# Altium PCB Microwave.PcbDoc
Units mm, origin at the board's own origin, x right, y up, seen from the top; angles counter-clockwise.
Board outline 71.12 x 41.91 mm, 2 copper layers (Top Layer, Bottom Layer); 51 components, 34 nets, 173 pads, 70 vias.
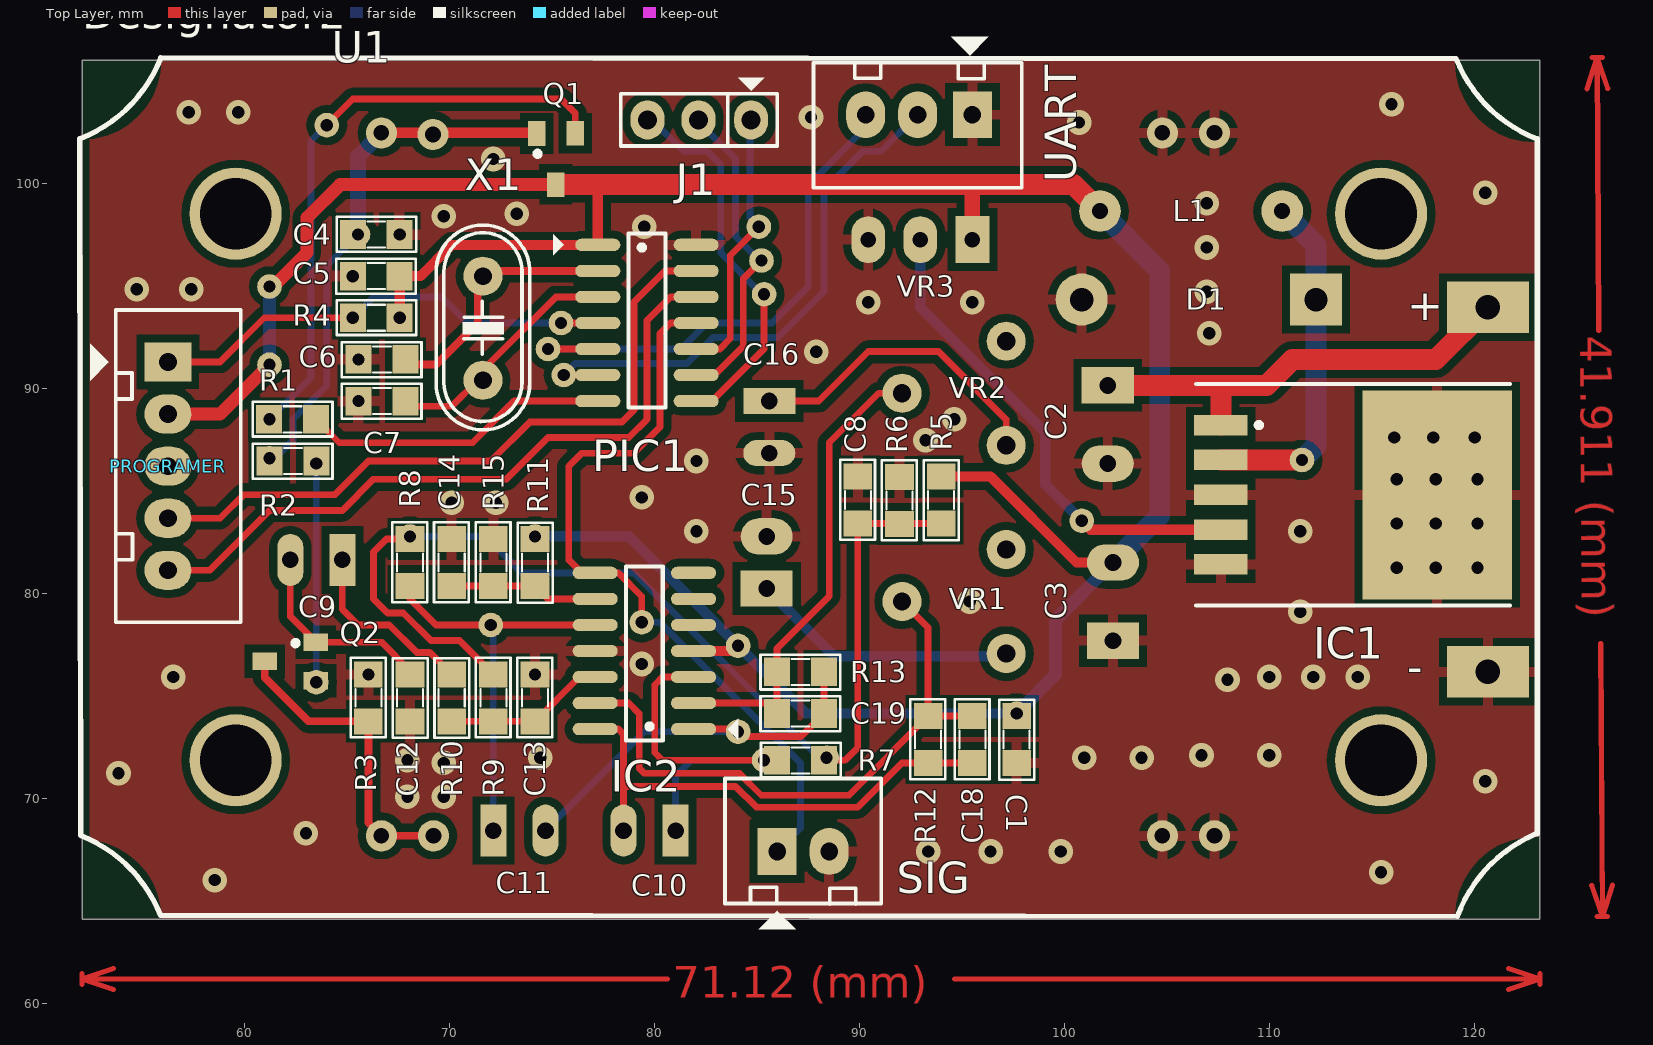
[diagram p0: Top Layer view]
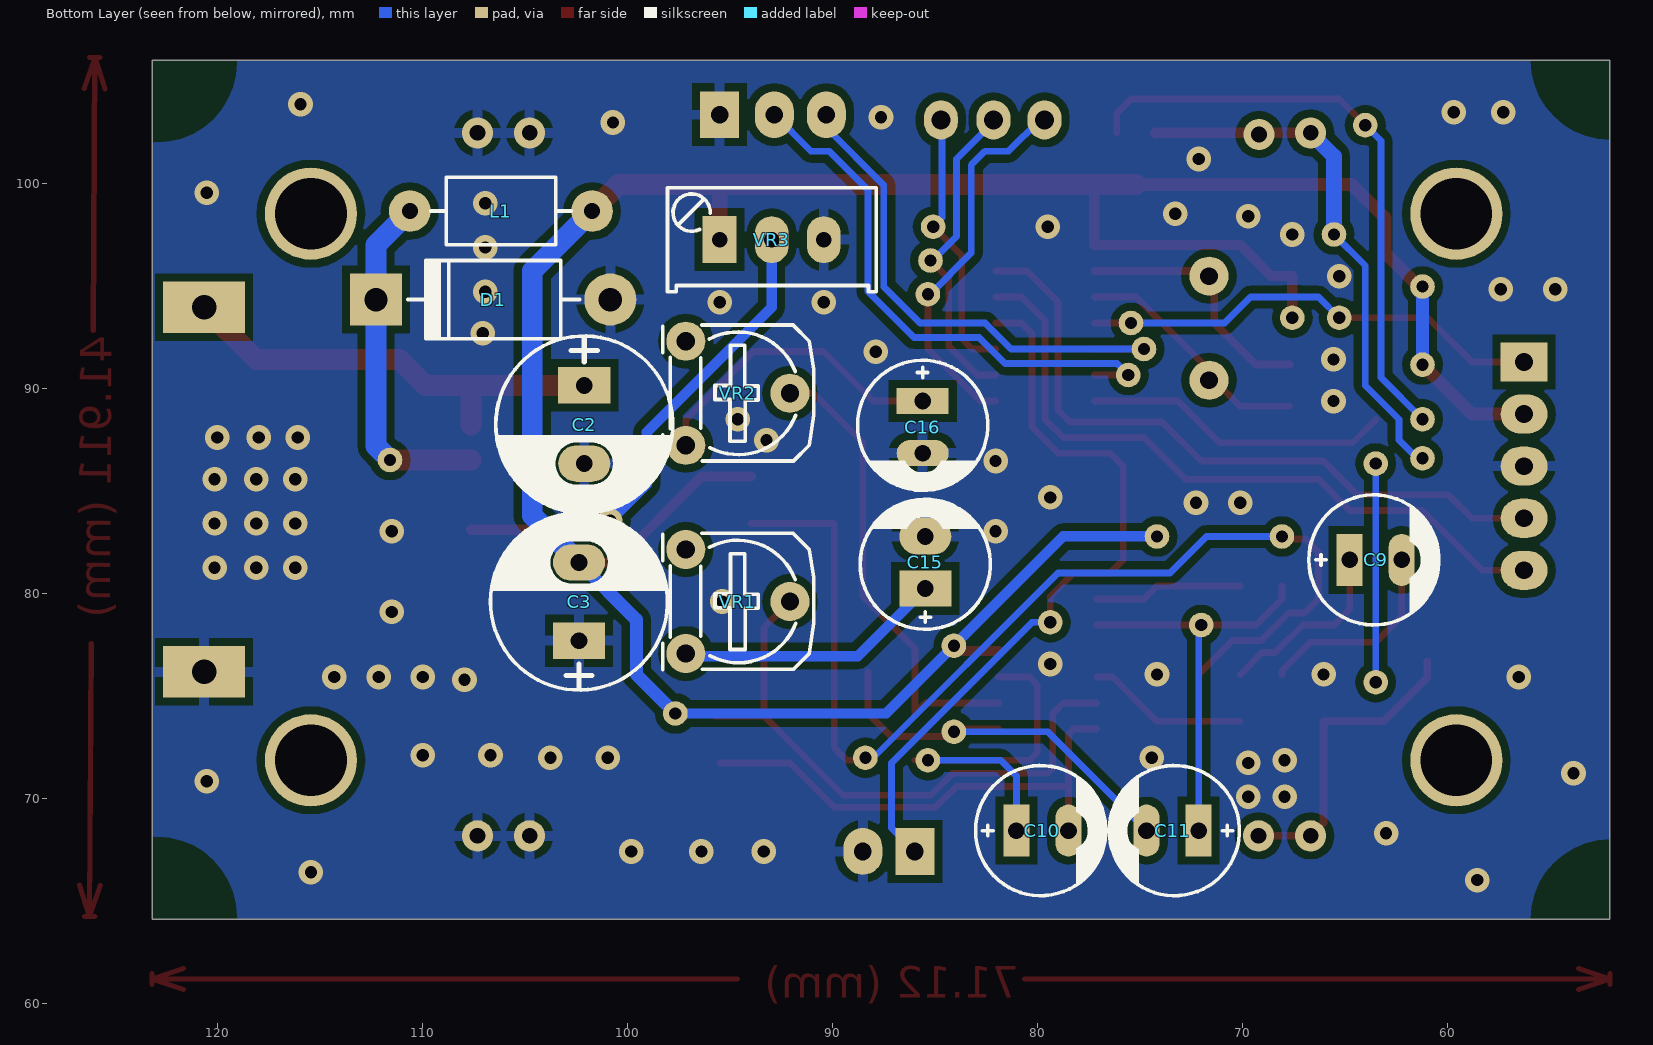
[diagram p1: Bottom Layer view, seen from below]
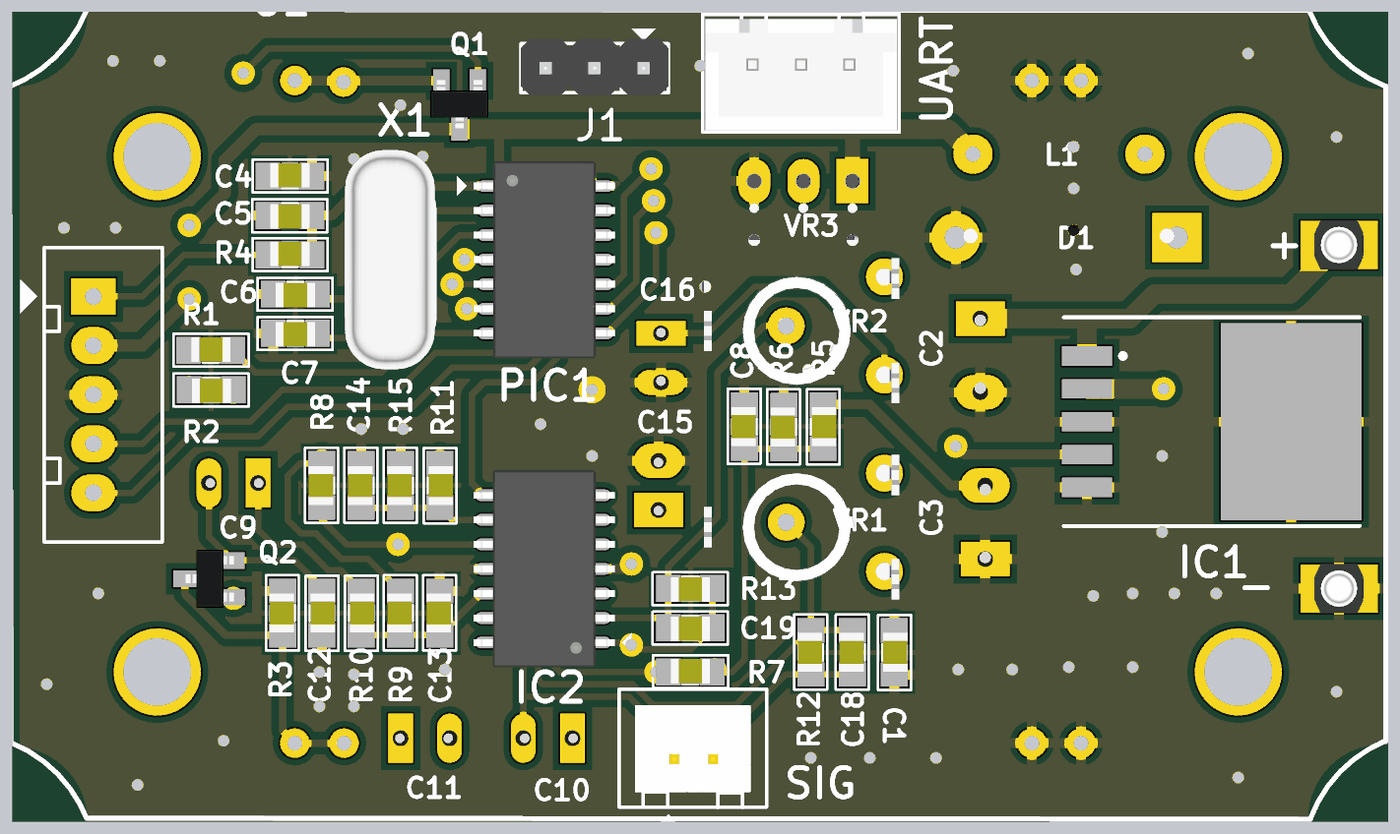
[diagram p2: 3D render of the assembled board from above, using the file's embedded part models]
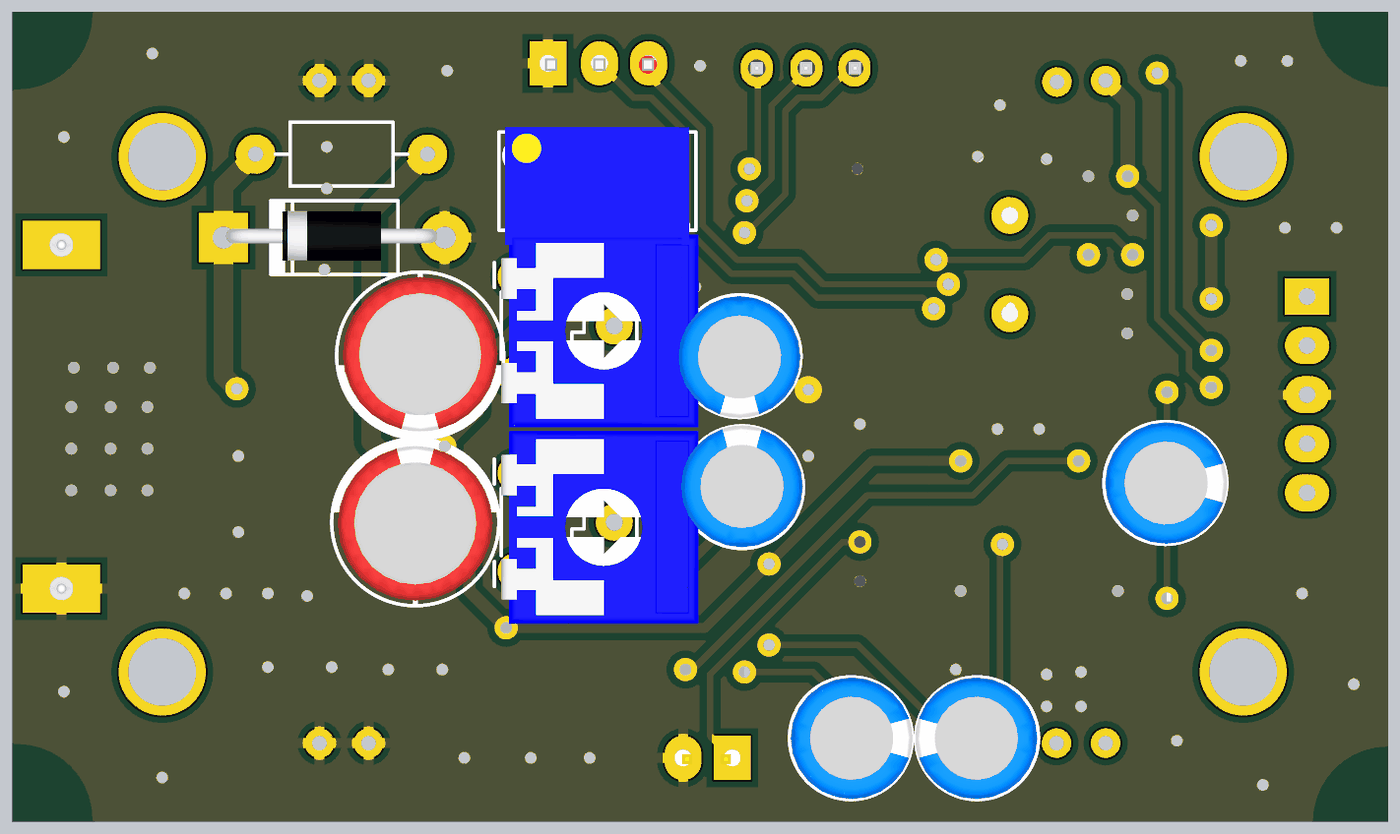
[diagram p3: 3D render of the assembled board from below, using the file's embedded part models]

## Layer stack, top to bottom
Top Layer: signal copper 0.0356
Dielectric: dielectric 0.32, FR-4, Dk 4.8
Bottom Layer: signal copper 0.0356

## Board outline
52.07,106.045 123.19,106.045 123.19,64.135 52.07,64.135

## Design rules (kind name [scope] priority, off if disabled: settings)
Clearance [All] p1: gap=0.381
PlaneConnect [All] p1: planeconnectstyle=Relief reliefexpansion=0.508 reliefentries=4 reliefconductorwidth=0.508 reliefairgap=0.254
PolygonConnect [All] p1: connectstyle=Relief reliefconductorwidth=0.508 reliefentries=4 polygonreliefangle="90 Angle"
RoomDefinition Microwave [InComponentClass('Microwave')] p1: confinementstyle=ConfineIn formatcopy=TRUE lockcomponents=FALSE outline 0,0 50.8,0 50.8,25.4 0,25.4
RoutingVias [All] p1: holewidth=0.711 width=1.27 viastyle="Through Hole" minholewidth=0.711 minwidth=1.27 maxholewidth=0.711 maxwidth=1.27
SilkscreenOverComponentPads [All] p1: minsilkscreentomaskgap=0.254
SolderMaskExpansion [All] p1: expansion=0.102
Width [All] p1: maxlimit=1.27 minlimit=0.254 preferedwidth=0.33
26 further rules are at their usual default settings.

## Components (designator, comment, footprint, x,y, rotation, side; value= is the part's Value field where it differs from the comment)
+ "1" TP 120.65,93.98 r0 top
- "1" TP 120.65,76.2 r0 top
C1 "104" SM-0805 97.663,72.898 r90 top
C2 "100uF/35V" CP1.5/3.4 102.108,90.17 r270 bottom
C3 "1000uF/16V" CP1.5/3.4 102.362,77.724 r90 bottom
C4 "104" SM-0805 66.421,97.536 r180 top
C5 "104" SM-0805 66.421,95.504 r0 top
C6 "22p" SM-0805 66.7,91.44 r0 top
C7 "22p" SM-0805 66.7,89.408 r0 top
C8 "104" SM-0805 89.916,84.582 r270 top
C9 "4.7uF" CP1/2.5#1 64.77,81.661 r180 bottom
C10 "10uF" CP1/2.5#1 81.026,68.453 r180 bottom
C11 "10uF" CP1/2.5#1 72.136,68.453 r0 bottom
C12 "104" SM-0805 68.072,74.93 r90 top
C13 "104" SM-0805 74.168,74.93 r270 top
C14 "104" SM-0805 70.104,81.534 r270 top
C15 "10uF" CP1/2.5#2 85.471,80.264 r90 bottom
C16 "10uF" CP1/2.5#1 85.598,89.408 r270 bottom
C18 "222" SM-0805 95.504,72.898 r270 top
C19 "222" SM-0805 87.122,74.168 r0 top
D1 "1N4007" D2A 112.268,94.361 r180 bottom
Designator2 "Comment" FT-131-BOX 87.884,84.709 r0 top locked
IC1 "LM2576" 936A-02 112.903,84.836 r270 top
IC2 "LM324" SO-14 79.502,77.851 r180 top
J1 "Jumper 3" JP3 82.169,103.124 r180 top
L1 "150mH" L/0.4 110.617,98.679 r180 bottom
PIC1 "PIC16F688" SO-14 79.629,92.583 r0 top
PROGRAMER "JP5" CON5 56.261,91.313 r270 top
Q1 "C1815" SOT23B 75.184,101.219 r180 top
Q2 "C1815" SOT23B 62.23,76.708 r90 top
R1 "5K1" SM-0805 62.332,88.519 r180 top
R2 "5K1" SM-0805 62.357,86.487 r0 top
R3 "12k" SM-0805 66.04,74.93 r270 top
R4 "47K" SM-0805 66.421,93.472 r180 top
R5 "100k" SM-0805 93.98,84.582 r90 top
R6 "100k" SM-0805 91.948,84.557 r270 top
R7 "330k" SM-0805 87.122,71.882 r180 top
R8 "330k" SM-0805 68.072,81.534 r270 top
R9 "330k" SM-0805 72.136,74.93 r270 top
R10 "12k" SM-0805 70.104,74.93 r90 top
R11 "100K" SM-0805 74.168,81.534 r90 top
R12 "1M" SM-0805 93.345,72.898 r270 top
R13 "1M" SM-0805 87.122,76.2 r0 top
R15 "100K" SM-0805 72.136,81.534 r270 top
SIG "JP2" CON2 85.979,67.437 r0 top
U1 "HB100" HB100_SENSOR 86.995,85.979 r0 top locked
UART "JP3" CON3 95.377,103.378 r180 top
VR1 "10K" VR 97.155,82.169 r270 bottom
VR2 "10K" VR 97.155,92.329 r270 bottom
VR3 "10K" VR1 95.504,97.282 r180 bottom
X1 "4Mhz" XT2 71.628,92.964 r270 top

## Footprints (in the part's own frame and the unit in brackets; to place one, negate y for a bottom-side part, rotate by r counter-clockwise, add the part's x,y. Pads: shape width x height; smd on the part's side, far side on the other; paste and mask are expansions set on the pad)
936A-02 [mm] "D2-PAK; 5 Leads; Body 14.7 (inc. leads) x 10.2 mm (LxW max)"
  rect 1x2.6 smd: 1(-3.4,-5.275) 2(-1.7,-5.275) 3(0,-5.275) 4(1.7,-5.275) 5(3.4,-5.275)
  rect 10.2x7.3 smd: 6(0,5.275)
  silkscreen extent -5.4,-6.48 5.4,8.82
CON2 [mil] "CON2"
  rect 75x90 hole 34: 1(0,0)
  oval 75x90 hole 34: 2(100,0)
  silkscreen extent -100,-150 200,140, body extent -68,-70 168,107, height 236
CON3 [mil] "CON 3"
  rect 75x90 hole 34: 1(-5,0)
  oval 75x90 hole 34: 2(100,0) 3(200,0)
  silkscreen extent -100,-150 300,140, body extent -95,-90 295,136, height 276
CON5 [mil] "CON5"
  rect 75x90 hole 34: 1(0,0)
  oval 75x90 hole 34: 2(100,0) 3(200,0) 4(300,0) 5(400,0)
  silkscreen extent -100,-150 500,140
CP1.5/3.4 [mil] "Tu hoa 220->470uF,16V, 470uF/16V,25V"
  rect 70x100 hole 32: 1(0,0)
  oval 70x100 hole 32: 2(150,0)
  silkscreen extent -95,-170 245,170, body extent -85,-157 230,157, height 446
CP1/2.5#1 [mil] "Tu hoa 33 >100 uF,50V, 220uF/16V,25V"
  rect 50x100 hole 32: 1(0,0)
  oval 50x100 hole 32: 2(100,0)
  silkscreen extent -78,-125 172,125, body extent -76,-124 172,124, height 422
CP1/2.5#2 [mil] "Tu hoa 33 >100 uF,50V, 220uF/16V,25V"
  rect 70x100 hole 32: 1(0,0)
  oval 70x100 hole 32: 2(100,0)
  silkscreen extent -78,-125 172,125, body extent -76,-124 172,124, height 422
D2A [mil] "Diode 2A, W 150mil, L 450mil"
  round 100 hole 45: 1(450,0)
  rect 100x100 hole 45: 2(0,0)
  silkscreen extent 61,-75 391,75, body extent 5,-47 435,54, height 100
FT-131-BOX [mm]
  round 4.5 hole 3.5: 0(-28.321,-12.827) 0(-28.321,13.843) 0(27.559,-12.827) 0(27.559,13.843)
  silkscreen extent -35.94,-20.45 35.18,21.46
HB100_SENSOR [mil] "HB100_SENSOR"
  round 60 hole 30: 1(-800,650) 2(-701,647) 3(700,650) 4(800,650) 5(700,-700) 6(800,-700) 7(-800,-700) 8(-700,-700)
JP3 [mil] "Jumper 3"
  oval 65x75 hole 36: 1(-100,0) 2(1,0) 3(99,0)
  silkscreen extent -150,-81 150,50, body extent -150,-60 150,55, height 355
L/0.4 [mil] "Inductor , 2 Pin, L 350mil, W 150 mil"
  round 80 hole 31: 1(0,0) 2(350,0)
  silkscreen extent 40,-65 310,65
SM-0805 [mil] "Compoment SMD 80x50mil"
  rect 50x55 smd: 1(-45,0) 2(45,0)
  silkscreen extent -77,-34 76,33, body extent -40,-27 40,23, height 24
SO-14 [mm] "SOIC, 14-Leads, Body 9.9x3.9mm, Pitch 1.27mm, IPC Medium Density"
  oval 2.2x0.6 smd: 1(-2.4,4.445) 2(-2.4,3.175) 3(-2.4,1.905) 4(-2.4,0.635) 5(-2.4,-0.635) 6(-2.4,-1.905) 7(-2.4,-3.175) 8(2.4,-3.175) 9(2.4,-1.905) 10(2.4,-0.635) 11(2.4,0.635) 12(2.4,1.905) 13(2.4,3.175) 14(2.4,4.445)
  silkscreen extent -4.57,-3.48 0.9,5, body extent -3.71,-4.47 3.59,5.73, height 1.1
SOT23B [mm] "SOT 23B"
  rect 0.85x1.2 smd: 1(0.94,-1.245) 2(0,1.25) 3(-0.95,-1.25)
  silkscreen extent 0.77,-0.38 1.02,-0.13, body extent -1.5,-1.3 1.5,1.2, height 1.06
TP [mm] "Connect 1"
  rect 4x2.5 hole 1.2: TP1(0,0)
  body extent -1.27,-1.27 1.27,1.27, height 4.53
VR [mil] "Resistor Variable"
  round 75 hole 35: 1(0,0) 2(100,200) 3(200,0)
  silkscreen extent -31,-44 231,246, body extent -87,-30 307,372, height 165
VR1 [mil] "Variable Resistor"
  rect 65x90 hole 30: 1(0,0)
  oval 65x90 hole 30: 2(100,0) 3(200,0)
  silkscreen extent -100,-100 301,100, body extent -88,-130 288,110, height 455
XT2 [mil] "Footpin for Crystal 2 pin"
  round 75 hole 34: 1(-100,0) 2(100,0)
  silkscreen extent -198,-90 195,90, body extent -233,-93 213,90, height 138

## Part data
+ -: library part TP, "CONNECT 1"
C1 C4 C8 C12 C13 C14 C18 C19: library part CN2, "Cap np 104 => 105pF"
C2: library part CP3, "Cap 100uF/35V - 470uF/16V"
C3: library part CP4, "Cap 1000uF/16V - 220uF/50V"
C5 C6 C7: library part CM, "Cap SMD"
C9 C10 C11 C15 C16: library part CP1, "Cap P  0,1uF < 22uF , 16 - 50V"
D1: library part D1A, "Diode 1A"
IC2: "Op x 4"
J1: library part JP3
L1: library part L1, "Inductor"
PROGRAMER: library part Con5, "Connector 5"
Q1 Q2: "NPN 600mW, ECB"
R1 R2 R3 R4 R5 R6 R7 R8 R9 R10 R11 R12 R13 R15: library part R, "Resistor 1/4W"
SIG: library part Con2, "Connector 2"
U1: library part HB100_SENSOR
UART: library part Con3, "Connector 3"
VR1 VR2 VR3: library part VR, "Var Resistor"
X1: library part XT2, "Crystal For all Crystal 2pin."

## Free pads (board coordinates)
  round 1.2 hole 0.6 paste+0 mask+0: 0(61.214,86.614) 0(61.214,88.522) 0(61.214,91.186) 0(61.214,94.996) 0(63.5,75.692) 0(63.5,86.36) 0(64.008,102.87) 0(65.278,93.472) 0(65.532,97.536) 0(67.564,93.472) 0(68.072,82.804) 0(72.009,78.486) 0(74.168,82.804) 0(74.803,91.948) 0(75.438,93.218) 0(75.565,90.678) 0(79.375,78.613) 0(84.074,73.279) 0(84.074,77.47) 0(85.09,97.917) 0(85.217,96.266) 0(85.344,71.882) 0(85.344,94.615) 0(88.392,72.009) 0(97.663,74.168) 0(100.838,83.566) 0(111.584,86.536)

## Via types
v1: diameter 1.2, hole 0.6, Top Layer to Bottom Layer, 49 vias
v2: diameter 1.2, hole 0.6, Top Layer to Bottom Layer, tented bottom, 21 vias

## Nets (pads, with @x,y where several pads share a name; then routed paths per layer and width w, separated by ;. In a path a pad name is that pad's centre, name@x,y a point inside that pad or via, vN(x,y) a via of type N, cw(c..) or ccw(c..) an arc to the next point about the centre after c; other vN are vias at no path point)
CTRL: PIC1.7 R1.1 | length 15.1
  Top Layer w0.33: R1.1 64.618,87.376 71.12,87.376 73.152,89.408 PIC1.7
GND: -.TP1 C1.1 C2.2 C3.1 C5.1 C6.1 C7.1 C8.1 C12.1 C13.1 C14.1 C15.2 C16.2 D1.1 IC1.3 IC1.5 IC1.6 IC2.11 PIC1.14 PROGRAMER.3 R3.1 R6.1 R15.1 SIG.2 U1.3 U1.4 U1.5 U1.6 UART.1 VR3.3
  other v1: 116.205,81.28 118.11,81.28 120.142,81.28 116.205,83.439 118.11,83.439 120.142,83.439 116.205,85.598 118.11,85.598 120.142,85.598 116.078,87.63 117.983,87.63 120.015,87.63 65.557,89.408 65.557,91.44 65.278,95.504
  other v2: 66.04,76.073 74.168,76.073
IF: C9.2 C12.2 Q2.1 | length 9.9
  Top Layer w0.33: C9.2 62.23,78.892 Q2.1 66.675,77.648 68.072,76.251 C12.2
Net+_TP1: +.TP1 C2.1 IC1.1 | length 22.1
  Top Layer w1.016: C2.1 107.696,90.17 ; IC1.1 107.628,90.102 107.696,90.17 ; +.TP1 118.11,91.44 111.125,91.44 109.855,90.17 107.696,90.17
NetC4_2: C4.2 pad.0@61.214,86.614 pad.0@65.532,97.536 Q1.1 R2.1 U1.1 U1.2 | length 25.9
  Top Layer w0.508: U1.1 74.219,102.489 Q1.1
  Bottom Layer w0.33: pad.0@61.214,86.614 61.468,86.614 62.36,87.506 62.36,88.522 64.008,90.17 64.008,96.012 pad.0@65.532,97.536
  Bottom Layer w0.762: pad.0@65.532,97.536 65.532,101.346 U1.1
NetC6_2: C6.2 PIC1.2 X1.1 | length 12.8
  Top Layer w0.381: C6.2@67.691,91.186 69.342,91.186 71.374,93.218 71.374,95.504 71.628,95.758 PIC1.2
NetC7_2: C7.2 PIC1.3 X1.2 | length 11.9
  Top Layer w0.33: C7.2@67.691,89.154 70.104,89.154 71.374,90.424 71.374,90.678 75.184,94.488 PIC1.3
NetC8_2: C8.2 pad.0@68.072,82.804 pad.0@88.392,72.009 R5.1 R6.2 R7.1 R8.1 R9.1 | length 53.4
  Top Layer w0.33: R8.1 66.929,82.677 66.294,82.042 66.294,79.756 66.98,79.07 67.742,79.07 69.088,77.724 70.485,77.724 R9.1 ; R7.1 89.281,71.882 89.916,72.517 C8.2 R5.1
  Bottom Layer w0.33: pad.0@68.072,82.804 71.755,82.804 73.533,81.026 78.994,81.026 88.011,72.009 pad.0@88.392,72.009
NetC9_1: C9.1 R10.2 | length 9.1
  Top Layer w0.33: C9.1 64.77,79.248 65.532,78.486 67.056,78.486 68.402,77.14 69.037,77.14 R10.2
NetC10_1: C10.1 IC2.3 pad.0@85.344,71.882 R7.2 | length 18.8
  Top Layer w0.33: IC2.3 80.391,75.946 80.01,75.565 80.01,72.263 80.391,71.882 85.344,71.882 R7.2
  Bottom Layer w0.33: C10.1 81.026,71.12 81.788,71.882 pad.0@85.344,71.882
NetC10_2: C10.2 C18.2 IC2.14 R12.2 | length 24.5
  Top Layer w0.33: IC2.14 78.232,73.406 78.486,73.152 C10.2 ; 78.486,70.612 83.947,70.612 84.963,69.596 89.916,69.596 92.075,71.755 R12.2 C18.2
NetC11_1: C11.1 IC2.10 pad.0@72.009,78.486 R8.2 | length 20.3
  Top Layer w0.33: R8.2 68.072,79.756 69.342,78.486 72.009,78.486 IC2.10
  Bottom Layer w0.33: pad.0@72.009,78.486 72.136,78.359 C11.1
NetC11_2: C11.2 C19.2 IC2.1 pad.0@84.074,73.279 R13.2 | length 20.4
  Top Layer w0.33: IC2.1 83.947,73.406 84.074,73.279 84.303,73.05 87.147,73.05 C19.2 R13.2
  Bottom Layer w0.33: C11.2 79.502,73.279 pad.0@84.074,73.279
NetC13_2: C13.2 IC2.12 R9.2 R10.1 | length 7.9
  Top Layer w0.33: R10.1 R9.2 C13.2 76.327,75.946 IC2.12
NetC14_2: C14.2 IC2.9 R11.1 R15.2 | length 7.3
  Top Layer w0.33: C14.2 R15.2 R11.1 74.803,79.756 IC2.9
NetC15_1: C15.1 VR1.3 | length 13.1
  Bottom Layer w0.508: C15.1 88.773,76.962 97.028,76.962 VR1.3
NetC16_1: C16.1 VR2.3 | length 15.7
  Top Layer w0.33: C16.1 88.011,89.408 90.424,91.821 93.853,91.821 97.155,88.519 VR2.3 VR2.3@96.774,87.63
NetC18_1: C18.1 IC2.13 R12.1 VR1.2 | length 29.8
  Top Layer w0.33: IC2.13 78.74,74.676 79.248,74.168 79.248,71.501 79.502,71.247 84.138,71.247 85.205,70.18 89.484,70.18 R12.1 ; VR1.2 93.345,78.359 R12.1 ; C18.1@95.758,74.041 C18.1 R12.1
NetC19_1: C19.1 IC2.2 R13.1 VR2.2 | length 23.1
  Top Layer w0.33: IC2.2 85.471,74.676 C19.1 R13.1 85.979,77.343 88.519,79.883 88.519,87.376 90.932,89.789 VR2.2
NetD1_2: D1.2 IC1.2 L1.1 pad.0@111.584,86.536 | length 17.1
  Top Layer w1.016: IC1.2 pad.0@111.584,86.536
  Bottom Layer w1.016: L1.1 112.268,97.028 D1.2 112.268,87.22 pad.0@111.584,86.536
NetIC1_4: IC1.4 pad.0@100.838,83.566 VR3.2 | length 23.9
  Top Layer w0.508: pad.0@100.838,83.566 101.268,83.136 IC1.4
  Bottom Layer w0.508: VR3.2 92.964,93.98 99.06,87.884 99.06,85.344 pad.0@100.838,83.566
NetJ1_1: J1.1 pad.0@85.09,97.917 PIC1.10 | length 13.3
  Top Layer w0.33: PIC1.10 83.185,91.948 83.693,92.456 83.693,96.52 pad.0@85.09,97.917
  Bottom Layer w0.33: J1.1 84.655,103.07 84.655,98.352 pad.0@85.09,97.917
NetJ1_2: J1.2 pad.0@85.217,96.266 PIC1.9 | length 15.6
  Top Layer w0.33: PIC1.9 82.931,90.678 84.325,92.072 84.325,95.374 pad.0@85.217,96.266
  Bottom Layer w0.33: J1.2 82.144,103.012 83.944,101.212 83.944,97.442 85.12,96.266 pad.0@85.217,96.266
NetJ1_3: J1.3 pad.0@85.344,94.615 PIC1.8 | length 18.8
  Top Layer w0.33: PIC1.8 82.804,89.408 85.344,91.948 pad.0@85.344,94.615
  Bottom Layer w0.33: J1.3 79.883,103.124 81.407,101.6 82.55,101.6 83.233,100.917 83.233,96.629 85.247,94.615 pad.0@85.344,94.615
NetPIC1_5: pad.0@74.803,91.948 PIC1.5 UART.3 | length 25.9
  Top Layer w0.33: pad.0@74.803,91.948 PIC1.5
  Bottom Layer w0.33: pad.0@74.803,91.948 81.28,91.948 82.55,93.218 85.725,93.218 87.503,94.996 87.503,99.949 90.297,102.743 UART.3
NetPIC1_6: pad.0@75.565,90.678 PIC1.6 UART.2 | length 27.1
  Top Layer w0.33: pad.0@75.565,90.678 PIC1.6
  Bottom Layer w0.33: pad.0@75.565,90.678 76.124,91.237 81.575,91.237 82.845,92.507 86.02,92.507 88.265,94.752 88.265,99.695 90.17,101.6 91.059,101.6 UART.2
NetPIC1_12: PIC1.12 PROGRAMER.5 | length 34.1
  Top Layer w0.33: PROGRAMER.5 58.293,81.153 61.214,84.074 64.77,84.074 66.294,85.598 72.771,85.598 74.803,87.63 78.74,87.63 79.629,88.519 79.629,93.345 80.772,94.488 PIC1.12
NetPIC1_13: PIC1.13 PROGRAMER.4 | length 33.8
  Top Layer w0.33: PROGRAMER.4 58.801,83.693 59.944,84.836 64.389,84.836 66.04,86.487 72.009,86.487 73.914,88.392 78.41,88.392 78.994,88.976 78.994,94.234 80.518,95.758 PIC1.13
NetQ1_3: pad.0@61.214,88.522 pad.0@64.008,102.87 Q1.3 R1.2 | length 29.4
  Top Layer w0.33: pad.0@64.008,102.87 65.278,104.14 75.438,104.14 76.134,103.444 Q1.3
  Bottom Layer w0.33: pad.0@61.214,88.522 63.246,90.554 63.246,102.108 pad.0@64.008,102.87
NetQ2_2: Q2.2 R3.2 U1.7 U1.8 | length 15.1
  Top Layer w0.381: Q2.2 60.98,75.926 63.119,73.787 R3.2 66.04,68.834 U1.7 U1.8
NetQ2_3: pad.0@63.5,75.692 pad.0@63.5,86.36 Q2.3 R2.2 | length 10.7
  Bottom Layer w0.33: pad.0@63.5,75.692 pad.0@63.5,86.36
OUT: IC2.8 pad.0@79.375,78.613 PIC1.11 SIG.1 | length 37.3
  Top Layer w0.33: pad.0@79.375,78.613 79.375,79.883 78.232,81.026 IC2.8 76.454,81.026 75.819,81.661 75.819,86.233 76.454,86.868 78.994,86.868 80.264,88.138 80.264,92.71 80.772,93.218 PIC1.11
  Bottom Layer w0.33: pad.0@79.375,78.613 80.264,78.613 87.122,71.755 87.122,68.58 SIG.1
VCC: C1.2 C3.2 C5.2 IC2.4 L1.2 pad.0@61.214,91.186 pad.0@61.214,94.996 pad.0@67.564,93.472 pad.0@74.168,82.804 pad.0@84.074,77.47 pad.0@97.663,74.168 PIC1.1 PROGRAMER.2 Q1.2 R4.1 R5.2 R11.2 VR3.1 | length 139.9
  Top Layer w0.5: R4.1 C5.2 68.58,95.504 70.104,97.028 PIC1.1 77.229,99.956 77.216,99.969 ; R5.2 96.393,85.725 100.584,81.534 C3.2
  Top Layer w0.508: IC2.4 83.82,77.216 pad.0@84.074,77.47
  Top Layer w0.635: PROGRAMER.2 58.801,88.773 pad.0@61.214,91.186 ; pad.0@61.214,94.996 61.395,94.996 63.046,96.647 63.046,98.352 64.663,99.969 Q1.2
  Top Layer w0.762: VR3.1 95.504,99.969
  Top Layer w1.016: Q1.2 77.216,99.969 95.504,99.969 100.437,99.969 L1.2
  Bottom Layer w0.508: pad.0@74.168,82.804 78.74,82.804 84.074,77.47 87.376,74.168 pad.0@97.663,74.168
  Bottom Layer w0.635: pad.0@61.214,91.186 pad.0@61.214,94.996 ; pad.0@97.663,74.168 99.568,76.073 99.568,78.74 C3.2
  Bottom Layer w1.016: L1.2 104.648,95.758 104.648,83.82 C3.2
VPP: pad.0@65.278,93.472 pad.0@75.438,93.218 PIC1.4 PROGRAMER.1 R4.2 | length 22.8
  Top Layer w0.33: PROGRAMER.1 58.801,91.313 60.96,93.472 R4.2 ; pad.0@75.438,93.218 PIC1.4
  Bottom Layer w0.33: pad.0@65.278,93.472 66.294,94.488 67.139,94.488 67.142,94.491 67.986,94.491 67.989,94.488 69.596,94.488 70.866,93.218 pad.0@75.438,93.218
pads on no net: C4.1 Designator2.0 IC2.5 IC2.6 IC2.7 VR1.1 VR2.1
copper on no net: | length 98.6
  Top Layer w0.254: 52.07,60.96 52.07,61.468 ; 53.594,60.706 52.07,61.214 ; 53.594,61.722 52.07,61.214 ; 80.622,61.214 52.07,61.214 ; 94.638,61.214 123.19,61.214 ; 121.666,60.706 123.19,61.214 ; 121.666,61.722 123.19,61.214 ; 123.19,60.96 123.19,61.468 ; 125.485,104.645 125.984,106.172 ; 125.721,65.783 126.238,64.262 ; 125.73,106.17 126.238,106.174 ; 125.984,64.26 126.492,64.264 ; 126.065,92.86 125.984,106.172 ; 126.157,77.574 126.238,64.262 ; 126.501,104.651 125.984,106.172 ; 126.737,65.789 126.238,64.262
  other v1: 58.547,66.04 62.992,68.326 67.945,70.104 69.723,70.104 53.848,71.247 69.723,71.755 67.945,71.882 74.422,72.009 100.965,72.009 103.759,72.009 109.982,72.136 107.95,75.819 56.515,75.946 109.982,75.946 112.141,75.946 114.3,75.946 111.506,79.121 82.042,83.058 111.506,83.058 79.375,84.709 82.042,86.487 87.884,91.821 107.061,92.71 90.424,94.234 106.934,94.742 54.737,94.869 57.404,94.869 106.934,96.901 69.723,98.425 73.279,98.552 106.934,99.06 87.63,103.251 57.277,103.505 59.69,103.505
  other v2: 115.443,66.421 93.345,67.437 96.393,67.437 99.822,67.437 120.523,70.866 106.68,72.136 79.375,76.581 95.377,79.629 70.104,84.455 72.263,84.455 93.218,87.503 94.615,88.519 95.504,94.234 67.564,97.536 79.502,97.917 120.523,99.568 72.136,101.219 100.711,102.997 115.951,103.886

## Polygon pours and split planes (outlines as drawn)
GND on Top Layer "Top Layer-No Net" (solid, pour order 4): 52.451,106.045 123.19,106.045 123.19,64.135 109.295,64.135 52.451,64.135 52.451,106.045
GND on Bottom Layer "Top Layer-No Net" (solid, pour order 6): 52.07,106.045 123.19,106.045 123.19,64.135 52.07,64.135

## Other copper
Top Layer:
  text "41.911 (mm)" at 125.152,92.6 h1.52 r270.35
  text "71.12 (mm)" at 80.876,60.3 h1.52